# Allegro board WCSA_SystemSchem_4-Layer.brd
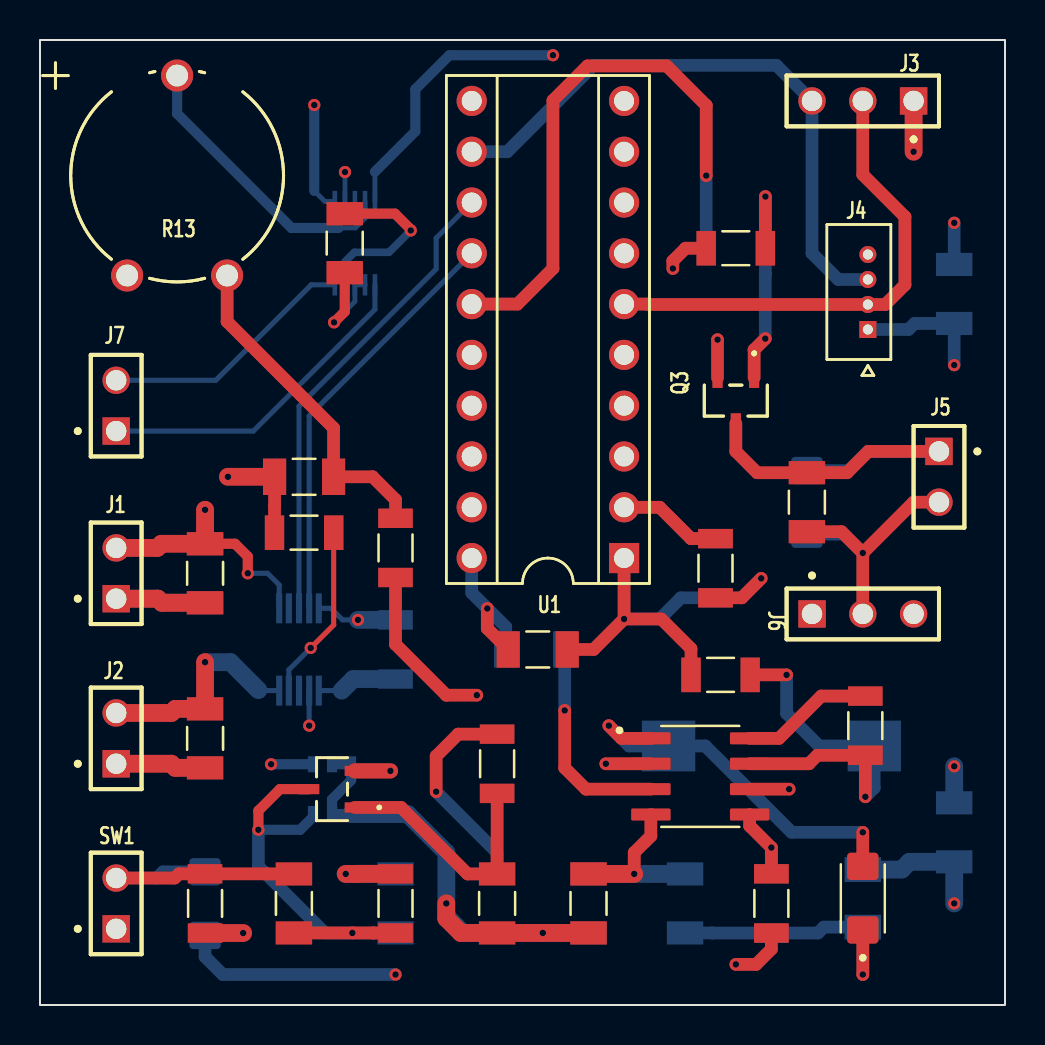
[diagram p0: board, top side]
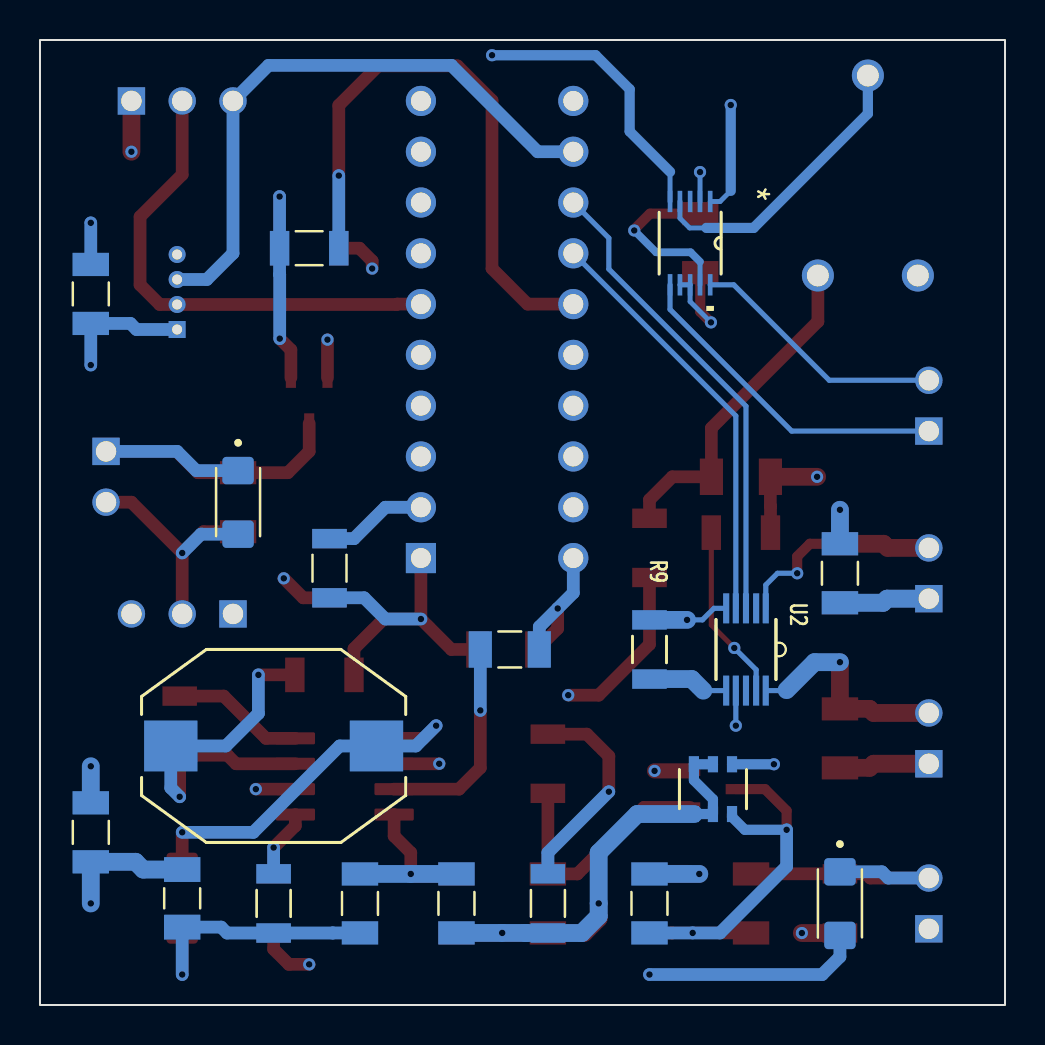
[diagram p1: board, bottom side, seen from below]

Outline 48.26 x 48.26 mm; copper layers: TOP, GND, DCV, BOTTOM. Coordinates in mm from the lower left corner of the outline.
Outline path: rectangle 0,0 48.26,48.26

## Design rules (mm)
constraint set DEFAULT: min track width 0.254

## Placement (name value [footprint] x y rotation side)
C1  100n  [CAPC3216X110N]  24.89 17.78 0 top
C2  10u  [CAPC3216X110N]  8.25 21.59 270 top
C3  10u  [CAPC3216X110N]  8.25 13.33 270 top
C4  100u  [CAPC3216X110N]  27.43 5.08 90 bottom
C5  1500p  [CAPC3216X110N]  24.77 17.78 180 bottom
C6  330u  [CAPC3216X110N]  32.26 5.08 90 bottom
C7  10u  [CAPC3216X110N]  8.25 21.59 270 bottom
C8  100n  [CAPC3216X110N]  27.43 5.08 90 top
C9  100n  [CAPC3216X110N]  17.78 5.08 270 bottom
C10  2.2u  [CAPC3216X110N]  22.86 5.08 90 top
C11  1u  [CAPC3216X110N]  12.7 5.08 270 top
C12  100n  [CAPC3216X110N]  38.35 25.15 90 top
C13  100n  [CAPC3216X110N]  13.21 26.42 180 top
C14  100n  [CAPC3216X110N]  45.72 35.56 270 bottom
C15  100u  [CAPC3216X110N]  45.72 8.64 90 bottom
C16  100n  [CAPC3216X110N]  15.24 38.1 270 top
D1  1N4001  [DIOSC190X340X116-2N]  8.25 5.08 270 bottom
D2  1N5819  [DIOSC190X340X116-2N]  41.15 5.33 90 top
D3  1N5819  [DIOSC190X340X116-2N]  38.35 25.15 270 bottom
J1  PWR_IN  [SAMTEC_MTSW-101-08-S-D-315]  3.81 20.32 0 top
J2  3.7V Li+Po  [SAMTEC_MTSW-101-08-S-D-315]  3.81 12.06 0 top
J3  UART_Header  [SAMTEC_TSW-101-24-G-T]  43.69 45.21 90 top
J4  LiDAR Header  [MOLEX_530470410]  41.4 33.78 270 top
J5  Vibration_Motor  [SAMTEC_MTSW-101-08-S-D-315]  44.96 27.69 180 top
J6  Jumper: +[3.3/5]V  [SAMTEC_TSW-101-24-G-T]  38.61 19.56 270 top
J7  Speaker  [SAMTEC_MTSW-101-08-S-D-315]  3.81 28.7 0 top
L1  170uH  [IND_SMT_DO3316P_12P95X9P4_COC]  36.58 12.95 180 bottom
L2  1uH  [INDC3216X95N]  41.15 5.33 90 bottom
Q1  ZXMD63P02X/ZTX  [ZXM62P02E6TA_DIO]  14.6 10.79 90 bottom
Q2  ZXMD63N02X/ZTX  [SOT23_2P9X1P3_DIO]  14.6 10.79 90 top
Q3  ZXMD63N02X/ZTX  [SOT23_2P9X1P3_DIO]  34.8 30.23 180 top
R1  10k  [RESC3116X65N]  8.25 5.08 270 top
R2  100k  [RESC3116X65N]  17.78 5.08 90 top
R3  300k  [RESC3116X65N]  22.86 12.06 270 top
R4  100k  [RESC3116X65N]  22.86 5.08 270 bottom
R5  0.22  [RESC3116X65N]  34.04 16.51 0 top
R6  180  [RESC3116X65N]  41.27 13.97 270 top
R7  3.6k  [RESC3116X65N]  36.58 5.08 90 bottom
R8  1.2k  [RESC3116X65N]  36.58 5.08 90 top
R9  2k  [RESC3116X65N]  17.78 17.78 270 bottom
R10  1k  [RESC3116X65N]  34.8 37.85 180 bottom
R11  100k  [RESC3116X65N]  34.8 37.85 180 top
R12  4.7k  [RESC3116X65N]  17.78 22.86 270 top
R13  T100k  [TO_-102A2020-S_PHR]  6.86 46.48 0 top
R14  20k  [RESC3116X65N]  33.78 21.84 90 bottom
R15  20k  [RESC3116X65N]  33.78 21.84 270 top
R16  10k  [RESC3116X65N]  13.21 23.62 0 top
SW1  Jump2  [SAMTEC_MTSW-101-08-S-D-315]  3.81 3.81 0 top
U1  PIC16F18345  [DIP-20-SOCKET]  25.4 33.78 90 top
U2  MCP73837  [SOP50P490X110-10N]  12.95 17.78 270 bottom
U3  MC3x063A  [SOIC127P599X175-8N]  33.02 11.43 0 top
U4  LM4667  [MUB10A]  15.75 38.1 270 bottom

## Library data of the parts
C1-C16 = C1206C241MGGACAUTO7210_2
D1-D3 = 1N5819
J1 J2 J5 J7 SW1 = Jump2_0
J3 J6 = SIPSOC-3_1
J4 = SIPSOC-4_0
L1 = L: User Part Number: PN; Tolerance: TOL
L2 = L
Q1 = DIPSOC-3x2_1: User Part Number: PN; Tolerance: TOL
Q2 Q3 = ZXMD63N02X/ZTX: User Part Number: PN; Tolerance: TOL
R1-R12 R14-R16 = RC1206JR-0713RL
R13 = POT_2: User Part Number: PN; Tolerance: TOL
U1 = DIP-20_1
U2 = DIPSOC-5x2_4
U3 = MC3x063A_8
U4 = DIPSOC-5x2_3: User Part Number: PN; Tolerance: TOL

## Footprints (pads in the part's own frame, mm; a bottom-side part is the same pattern mirrored in y, then rotated)
CAPC3216X110N
  rect 1.16x1.82 smd: 1(-1.475,0) 2(1.475,0)
DIOSC190X340X116-2N
  custom 1.37x1.57 smd: 1(-1.58,0) 2(1.6,0)
DIP-20-SOCKET
  rect 1.508x1.508 hole 1: 1(-11.43,-3.81)
  round 1.508 hole 1: 2(-8.89,-3.81) 3(-6.35,-3.81) 4(-3.81,-3.81) 5(-1.27,-3.81) 6(1.27,-3.81) 7(3.81,-3.81) 8(6.35,-3.81) 9(8.89,-3.81) 10(11.43,-3.81) 11(11.43,3.81) 12(8.89,3.81) 13(6.35,3.81) 14(3.81,3.81) 15(1.27,3.81) 16(-1.27,3.81) 17(-3.81,3.81) 18(-6.35,3.81) 19(-8.89,3.81) 20(-11.43,3.81)
IND_SMT_DO3316P_12P95X9P4_COC
  rect 2.667x2.54 smd: 1(-5.144,0) 2(5.144,0)
INDC3216X95N
  rect 1.24x1.82 smd: 1(-1.44,0) 2(1.44,0)
MOLEX_530470410
  rect 0.85x0.85 hole 0.5: 1(0,0)
  round 0.85 hole 0.5: 2(-1.25,0) 3(-2.5,0) 4(-3.75,0)
MUB10A
  rect 1.067x0.229 smd: 1(-2.083,1.003) 2(-2.083,0.495) 3(-2.083,0) 4(-2.083,-0.508) 5(-2.083,-1.003) 6(2.083,-1.003) 7(2.083,-0.508) 8(2.083,0) 9(2.083,0.495) 10(2.083,1.003)
RESC3116X65N
  rect 0.97x1.73 smd: 1(-1.48,0) 2(1.48,0)
SAMTEC_MTSW-101-08-S-D-315
  rect 1.37x1.37 hole 1.02: 1(0,0)
  round 1.37 hole 1.02: 2(0,2.54)
SAMTEC_TSW-101-24-G-T
  rect 1.37x1.37 hole 1.02: 1(0,0)
  round 1.37 hole 1.02: 2(0,2.54) 3(0,5.08)
SOIC127P599X175-8N
  custom 1.97x0.6 smd: 1(-2.47,1.905) 2(-2.47,0.635) 3(-2.47,-0.635) 4(-2.47,-1.905) 5(2.47,-1.905) 6(2.47,-0.635) 7(2.47,0.635) 8(2.47,1.905)
SOP50P490X110-10N
  rect 1.499x0.305 smd: 1(-2.057,0.991) 2(-2.057,0.508) 3(-2.057,0) 4(-2.057,-0.508) 5(-2.057,-0.991) 6(2.057,-0.991) 7(2.057,-0.508) 8(2.057,0) 9(2.057,0.508) 10(2.057,0.991)
SOT23_2P9X1P3_DIO
  rect 0.508x1.016 smd: 1(0.914,-1.143) 2(-0.914,-1.143) 3(0,1.143)
TO_-102A2020-S_PHR
  round 1.6 hole 1.092: 1(-2.5,-10) 2(0,0) 3(2.5,-10)
ZXM62P02E6TA_DIO
  rect 0.802x0.508 smd: 1(-1.245,0.953) 2(-1.245,0) 3(-1.245,-0.953) 4(1.245,-0.953) 5(1.245,0) 6(1.245,0.953)

## Nets
+5V: C14.1 C15.1 J4.4 J6.3 L2.2
GND: C1.1 C2.2 C3.2 C4.2 C5.2 C6.2 C7.2 C8.2 C13.2 C14.2 C15.2 C16.2 J1.1 J2.1 J3.1 J4.1 Q2.1(S) Q3.1(S) R8.1 R9.1 R11.2 R13.1 R15.2 R16.1 SW1.1 U1.20 U2.5 U2.7 U3.2 U3.4 U4.2 U4.7 U4.8
VBAT: C3.1 C9.1 J2.2(PIN2) Q1.4(S) R1.2 R2.2 U2.10
VDD: C1.2 C4.1 C8.1 C10.1 C16.1 J6.1 Q1.1 Q1.2 Q1.5 Q1.6 R4.2 R5.1 R14.1 U1.1 U3.6(VCC) U4.9
RA2-CCP3: D1.2 R3.1 R4.1 U1.17
RA4-CCP4: R12.2 U1.3
RA5-ADC: R14.2 R15.1 U1.2
RB4 - STAT1: U1.13 U2.3
RB5-RX: J3.3 J4.3 U1.12
RB7-SPKR_SD: U1.10 U4.1
RC1-PWM5: R10.2 U1.15
RC2 - STAT2: U1.14 U2.4
RC4-TX: J3.2 J4.2 U1.6
RC6-SPKR_G: U1.8 U4.5
VCHG: C2.1 C7.1 J1.2(PIN2) U2.1
N11607: R9.2 U2.6
N12112: L1.1 R5.2 R6.2 U3.7
N12132: D2.2 L1.2 U3.1
N12244: C6.1 D2.1(CAT) L2.1 R7.1
N12286: R7.2 R8.2 U3.5
N14206: C5.1 U3.3
N88931: C9.2 C11.2 Q1.3 Q2.3 R2.1
N88985: C10.2 Q2.2 R3.2
N92811: C11.1 D1.1(CAT) R1.1 SW1.2(PIN2)
N99325: Q3.2 R10.1 R11.1
N99590: C12.2 D3.1(CAT) J5.1 Q3.3
N99769: C12.1 D3.2 J5.2(PIN2) J6.2
N102392: C13.1 R12.1 R13.3
N102677: R13.2(WIPER) U4.4
N102956: J7.2(PIN2) U4.10(VO2)
N102965: J7.1 U4.6
N121987: R6.1 U3.8
N123441: R16.2 U2.9

Pads without a net: U1 4 5 7 9 11 16 18 19; U2 2 8; U4 3

## Via types
v1: diameter 0.61, hole 0.33, TOP to BOTTOM, 48 vias

## Routing (per net, layer and track width the routed paths; a pad name or vN(x,y) marks a point on that pad's centre or on a via; arc(x,y) is an arc through that point)
+5V: length 16.7
  DCV w0.254: 44.6,19.56 J6.3 43.69,20.47
  DCV w0.635: 43.69,20.47 43.68,20.46 43.68,19.57 J6.3 43.69,18.03 ; J4.4 44.9,37.53
  BOTTOM w0.635: C14.1 v1(45.72,39.12)
  BOTTOM w0.889: v1(45.72,5.08) C15.1 43.48,7.16 43.1,6.77 L2.2
GND: length 99.1
  TOP w0.508: C16.2 15.24,34.67 v1(14.71,34.14)
  TOP w0.635: R16.1 11.73,24.93 11.73,24.94 C13.2 ; R15.2 35.1,20.36 v1(36.07,21.34) ; v1(29.72,6.55) 29.72,7.62 30.55,8.45 U3.4 ; U3.2 v1(28.3,12.06) ; R8.1 36.58,2.79 35.81,2.03 v1(34.8,2.03) ; v1(22.37,19.83) 22.37,18.83 C1.1 ; Q3.1 v1(33.88,33.27) ; R11.2 32.28,37.85 31.65,37.21 v1(31.65,36.83)
  TOP w0.762: Q2.1 v1(17.53,11.71)
  TOP w0.889: C13.2 v1(9.4,26.42) ; J2.1 6.57,12.06 6.77,11.86 C3.2 ; C8.2 v1(29.72,6.55) ; C2.2 6.1,20.12 5.89,20.32 J1.1 ; J3.1 v1(43.69,42.67)
  GND w0.254: 3.81,2.9 SW1.1 ; SW1.1 2.9,3.81 ; SW1.1 3.81,4.72 ; SW1.1 4.72,3.81 ; 4.36,35.45 R13.1 ; R13.1 3.33,36.48 ; R13.1 5.39,36.48 ; R13.1 4.36,37.51 ; J2.1 3.81,12.98 ; J2.1 3.81,11.15 ; J2.1 4.72,12.06 ; J2.1 2.9,12.06 ; 21.59,21.37 U1.20 ; U1.20 21.59,23.34 ; U1.20 22.57,22.35 ; U1.20 20.61,22.35 ; J1.1 4.72,20.32 ; J1.1 3.81,19.41 ; J1.1 3.81,21.23 ; J1.1 2.9,20.32 ; J3.1 43.69,46.13 ; J3.1 43.69,44.3 ; J3.1 42.77,45.21 ; J3.1 44.6,45.21 ; J4.1 42.06,33.78 ; J4.1 40.75,33.78 ; J4.1 41.4,33.13
  BOTTOM w0.241: U4.8 15.75,35.18 v1(14.71,34.14) ; U4.2 v1(15.25,41.66)
  BOTTOM w0.254: v1(15.9,19.26) 15.13,19.26 14.55,19.84 U2.5 ; U2.7 v1(13.46,13.97) ; U4.7 U4.8
  BOTTOM w0.635: C5.2 23.29,18.91 v1(22.37,19.83) 21.59,20.61 U1.20 ; v1(45.72,32) C14.2 43.74,34.09 43.43,33.78 J4.1
  BOTTOM w0.889: C2.2 6.1,20.12 5.89,20.32 J1.1 ; C15.2 v1(45.72,11.94) ; C6.2 v1(29.72,6.55) C8.2 ; R9.1 v1(15.9,19.26)
VBAT: length 23.8
  TOP w0.889: v1(8.25,17.14) C3.1 6.77,14.81 6.57,14.6 J2.2 ; R1.2 v1(10.16,3.6) ; R2.2 15.85,6.56 15.85,6.55 v1(15.29,6.55)
  DCV w0.254: 3.81,13.69 J2.2 ; J2.2 3.81,15.52 ; J2.2 4.72,14.6 ; J2.2 2.9,14.6
  BOTTOM w0.254: U2.10 10.95,15.72 10.92,15.75
  BOTTOM w0.508: Q1.4 v1(11.56,12.04)
  BOTTOM w0.889: C9.1 v1(15.29,6.55) ; v1(8.25,17.14) 9.52,17.14 10.92,15.75
VDD: length 66.4
  TOP w0.508: C16.1 17.75,39.57 18.54,38.79 v1(18.54,38.73)
  TOP w0.635: R5.1 32.56,17.82 31.07,19.3 v1(29.21,19.3) ; v1(29.21,19.3) U1.1 ; v1(29.21,19.3) 27.69,17.78 C1.2 ; 35.49,10.79 v1(37.47,10.79)
  TOP w0.889: C8.1 v1(25.15,3.61) C10.1 21.05,3.61 20.32,4.33 v1(20.32,5.08)
  DCV w0.254: U1.1 30.19,22.35 ; U1.1 29.21,23.34 ; U1.1 29.21,21.37 ; U1.1 28.23,22.35 ; 38.61,20.47 J6.1 38.61,18.64
  DCV w0.635: J6.1 36.32,19.56 ; v1(18.54,38.73) 18.54,37.08
  BOTTOM w0.241: 15.25,37.17 U4.9
  BOTTOM w0.381: 15.25,37.17 15.72,37.64 17.45,37.64 v1(18.54,38.73)
  BOTTOM w0.508: Q1.1 Q1.2 14.6,10.29 15.56,11.24 Q1.6 Q1.5
  BOTTOM w0.635: R14.1 32.05,20.36 30.99,19.3 v1(29.21,19.3)
  BOTTOM w0.889: Q1.1 18.39,9.55 20.32,7.62 v1(20.32,5.08) 20.32,4.44 21.16,3.6 R4.2 23.98,3.6 23.98,3.61 v1(25.15,3.61) C8.1
RA2-CCP3: length 51.6
  TOP w0.635: v1(19.81,10.67) 19.81,12.45 20.91,13.55 R3.1
  DCV w0.635: U1.17 19.81,28.19 v1(19.81,10.67) 17.78,8.64 v1(17.78,1.52)
  BOTTOM w0.635: v1(17.78,1.52) 9.14,1.52 8.25,2.41 D1.2 ; v1(19.81,10.67) 22.86,7.62 R4.1
RA4-CCP4: length 24.2
  TOP w0.635: R12.2 17.78,18.03 20.32,15.49 v1(21.84,15.49)
  DCV w0.635: v1(21.84,15.49) 23.11,15.49 24.89,17.27 24.89,23.11 U1.3
RA5-ADC: length 10.4
  TOP w0.635: U1.2 30.99,24.89 32.56,23.32 R15.1
  BOTTOM w0.635: R15.1 32.56,23.32 30.99,24.89 U1.2
RB4 - STAT1: length 23.9
  BOTTOM w0.254: U2.3 12.95,29.95 19.81,36.8 19.81,38.35 U1.13
RB5-RX: length 30.5
  BOTTOM w0.635: J4.3 39.92,36.28 38.61,37.59 J3.3 36.83,46.99 27.69,46.99 23.37,42.67 U1.12
RB7-SPKR_SD: length 23.7
  GND w0.635: U1.10 24.89,45.21 22.61,47.5 15.01,47.5 13.72,46.2 v1(13.72,45.01)
  BOTTOM w0.241: 13.72,40.72 14.25,40.18 U4.1
  BOTTOM w0.508: v1(13.72,45.01) 13.72,40.72
RC1-PWM5: length 29.5
  TOP w0.635: v1(33.32,41.48) 33.32,44.99 31.34,46.96 27.38,46.96 25.65,45.24 25.65,36.83 23.88,35.05 U1.15
  BOTTOM w0.635: R10.2 v1(33.32,41.48)
RC2 - STAT2: length 21.1
  BOTTOM w0.254: U1.14 13.46,29.46 U2.4
RC4-TX: length 24.5
  TOP w0.635: J3.2 41.15,41.53 43.26,39.42 43.26,36.02 42.27,35.03 J4.2 30.43,35.03 30.41,35.05 U1.6
RC6-SPKR_G: length 22.9
  DCV w0.635: U1.8 25.65,43.69 v1(25.65,47.5)
  BOTTOM w0.241: 16.75,41.67 U4.5
  BOTTOM w0.508: v1(25.65,47.5) 20.47,47.5 18.77,45.8 18.77,43.69 16.75,41.67
VCHG: length 14.2
  TOP w0.508: C2.1 9.76,23.06 10.39,22.43 v1(10.39,21.59)
  TOP w0.889: v1(8.25,24.77) C2.1 6.07,23.06 5.87,22.86 J1.2
  BOTTOM w0.254: U2.1 11.96,21.01 11.38,21.59 v1(10.39,21.59)
  BOTTOM w0.889: C2.1 v1(8.25,24.77)
N11607: length 4.1
  BOTTOM w0.254: U2.6 15.09,15.72
  BOTTOM w0.889: 15.09,15.72 15.67,16.3 R9.2
N12112: length 19.6
  TOP w0.635: v1(37.34,16.51) R5.2 ; v1(41.27,10.41) R6.2 38.88,12.49 38.46,12.06 U3.7
  BOTTOM w0.635: v1(41.27,10.41) 41.72,10.86 L1.1 38.96,12.95 37.34,14.58 v1(37.34,16.51)
N12132: length 19.1
  TOP w0.635: 41.05,6.93 D2.2 v1(41.15,8.64) ; v1(28.45,13.97) 29.08,13.33 U3.1
  BOTTOM w0.635: v1(41.15,8.64) 37.59,8.64 33.27,12.95 L1.2 29.46,12.95 v1(28.45,13.97)
N12244: length 13.6
  TOP w0.635: v1(41.15,1.52) D2.1
  BOTTOM w0.635: v1(41.15,1.52) L2.1 39.2,3.89 38.91,3.6 R7.1 33.62,3.6 33.61,3.61 C6.1
N12286: length 4.7
  TOP w0.635: U3.5 35.49,8.96 v1(36.58,7.87) R8.2
  BOTTOM w0.635: v1(36.58,7.87) R8.2
N14206: length 10.7
  TOP w0.635: 30.55,10.79 27.3,10.79 26.24,11.86 v1(26.24,14.73)
  BOTTOM w0.635: v1(26.24,14.73) C5.1
N88931: length 22.2
  TOP w0.508: v1(10.92,8.76) 10.92,9.72 12,10.79 Q2.3
  TOP w0.635: R2.1 16.66,3.6 16.66,3.61 v1(15.62,3.61) C11.2
  BOTTOM w0.508: Q1.3 13.65,9.4 13.01,8.76 v1(10.92,8.76)
  BOTTOM w0.635: v1(10.92,8.76) 10.92,6.93 14.25,3.61 v1(15.62,3.61) C9.2
N88985: length 12.5
  TOP w0.635: Q2.2 18.06,9.88 21.39,6.55 C10.2 R3.2
N92811: length 13.6
  TOP w0.635: C11.1 11.35,6.55 11.34,6.56 R1.1 6.95,6.56 6.74,6.35 SW1.2
  BOTTOM w0.635: SW1.2 5.84,6.35 6.15,6.66 D1.1
N99325: length 11.9
  TOP w0.635: Q3.2 35.71,32.77 v1(36.27,33.32) ; R11.1 v1(36.28,40.43)
  BOTTOM w0.635: v1(36.28,40.43) R11.1 36.28,36.54 36.27,36.53 v1(36.27,33.32)
N99590: length 19.4
  TOP w0.635: J5.1 41.43,27.69 40.36,26.62 C12.2 35.86,26.62 34.8,27.69 Q3.3
  BOTTOM w0.635: J5.1 41.4,27.69 40.44,26.73 D3.1
N99769: length 14.3
  TOP w0.635: v1(41.15,22.61) 40.08,23.67 C12.1 ; v1(41.15,22.61) 43.69,25.15 J5.2 ; v1(41.15,22.61) J6.2
  BOTTOM w0.635: D3.2 40.21,23.55 v1(41.15,22.61)
N102392: length 16.8
  TOP w0.635: R13.3 9.36,34.18 14.68,28.85 C13.1 16.63,26.42 17.78,25.27 R12.1
N102677: length 14.7
  BOTTOM w0.241: 14.94,38.86 15.77,38.86 16.26,39.34 U4.4
  BOTTOM w0.508: R13.2 6.86,44.58 12.57,38.86 14.94,38.86
N102956: length 12.9
  BOTTOM w0.254: J7.2 8.79,31.24 13.56,36.02 U4.10
N102965: length 16.7
  BOTTOM w0.254: U4.6 16.75,34.79 10.67,28.7 J7.1
N121987: length 6.7
  TOP w0.635: R6.1 39.07,15.45 36.96,13.33 U3.8
N123441: length 8.8
  TOP w0.254: R16.2 14.69,19.01 v1(13.54,17.86)
  BOTTOM w0.254: v1(13.54,17.86) 12.45,16.76 U2.9

## Copper pours and planes (outline as drawn; the poured copper is in the pictures)
+5V on DCV: 46.99,1.27 46.99,46.99 42.93,46.99 42.93,1.27
GND on GND: 1.27,1.27 46.99,1.27 46.99,46.99 34.29,46.99 30.99,43.69 12.45,43.69 8.89,47.24 1.27,47.24
VBAT on DCV: 1.27,1.27 1.27,17.78 16.51,17.78 16.51,1.27
VDD on DCV: 19.05,1.27 19.05,8.38 26.16,15.49 26.16,22.35 30.48,26.67 30.48,28.19 29.72,28.96 24.38,28.96 18.03,35.31 18.03,37.34 39.37,37.34 39.37,1.27

## Text on the board
User.8: FIGURE | FINISHED_SIZE | 13.0 | 19.69 | 39.37 | 40.16 | 43.0 | DRILL CHART: TOP to BOTTOM | ALL UNITS ARE IN MILS | PLATED | QTY | 48 | 4 | 20 | 16 | 3
